# Altium PCB Main.PcbDoc
Units mil, origin at the board's own origin, x right, y up, seen from the top; angles counter-clockwise.
Board outline 2475 x 1740 mil, 2 copper layers (Top Layer, Bottom Layer); 63 components, 40 nets, 195 pads, 60 vias.
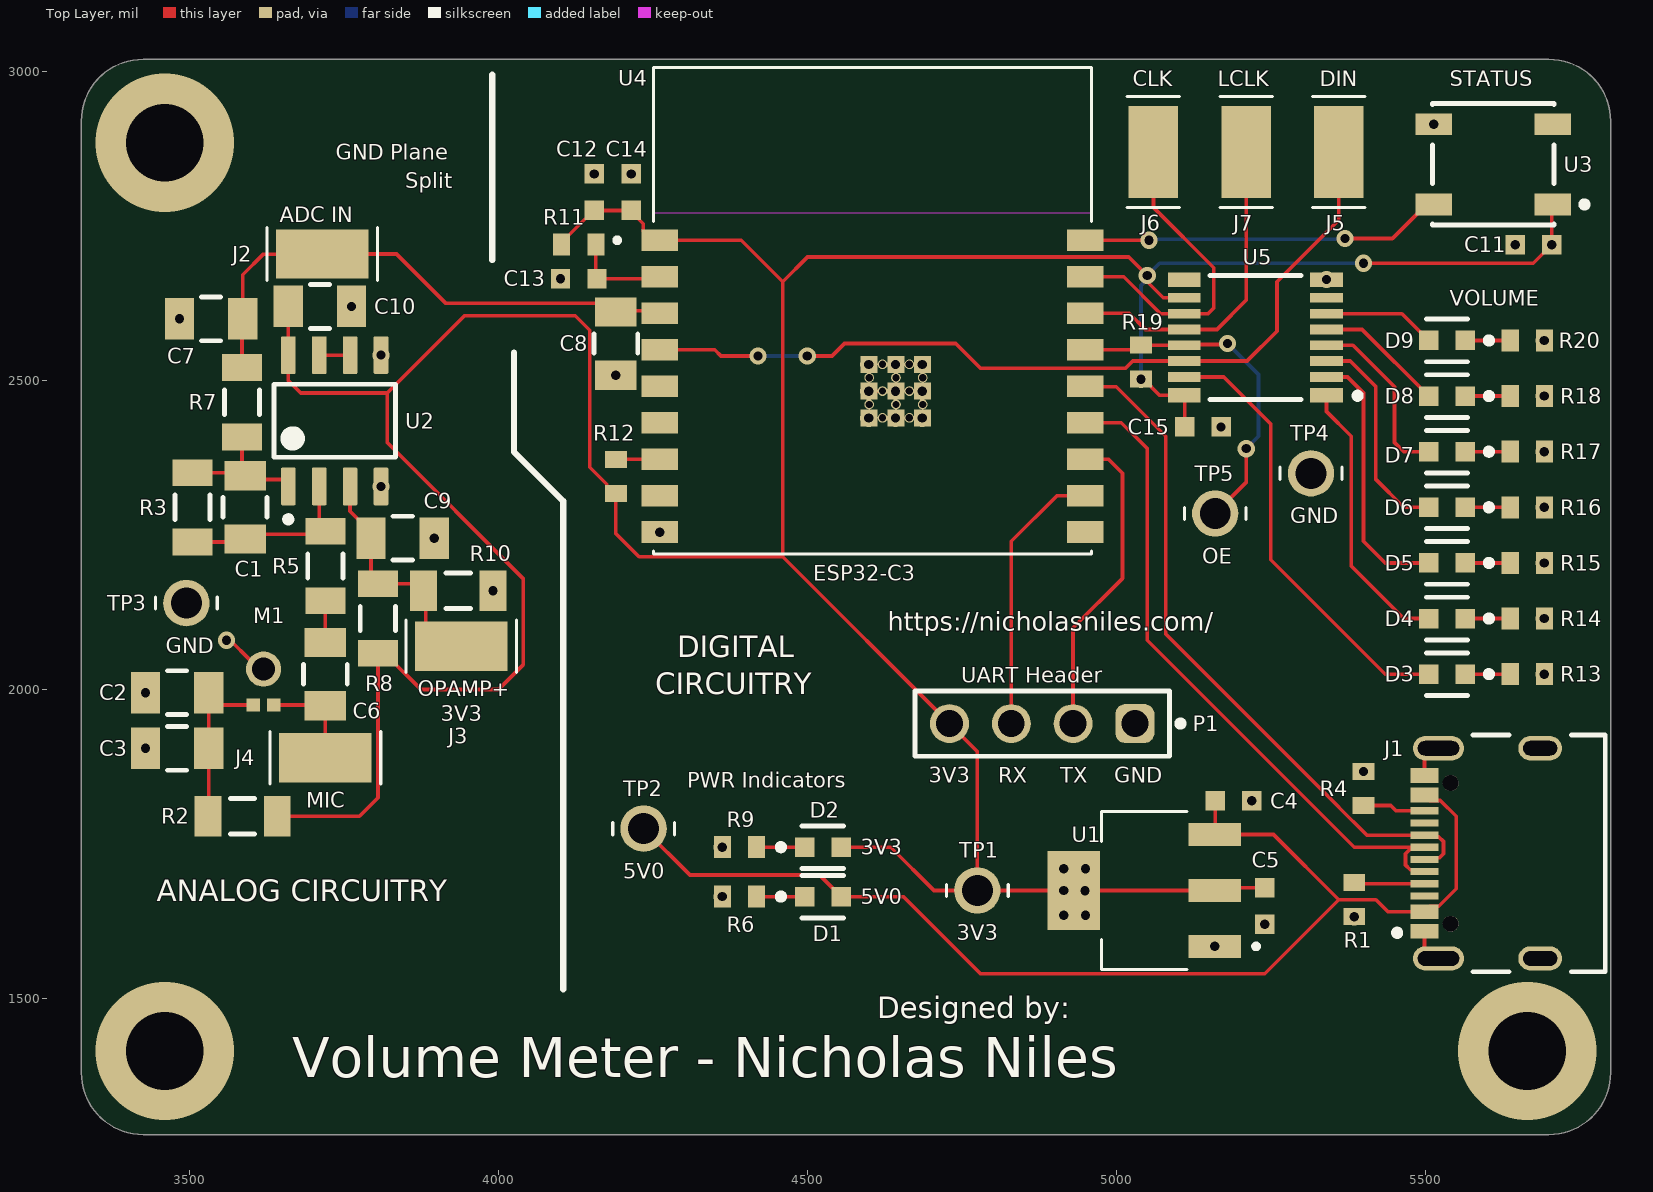
[diagram p0: Top Layer view]
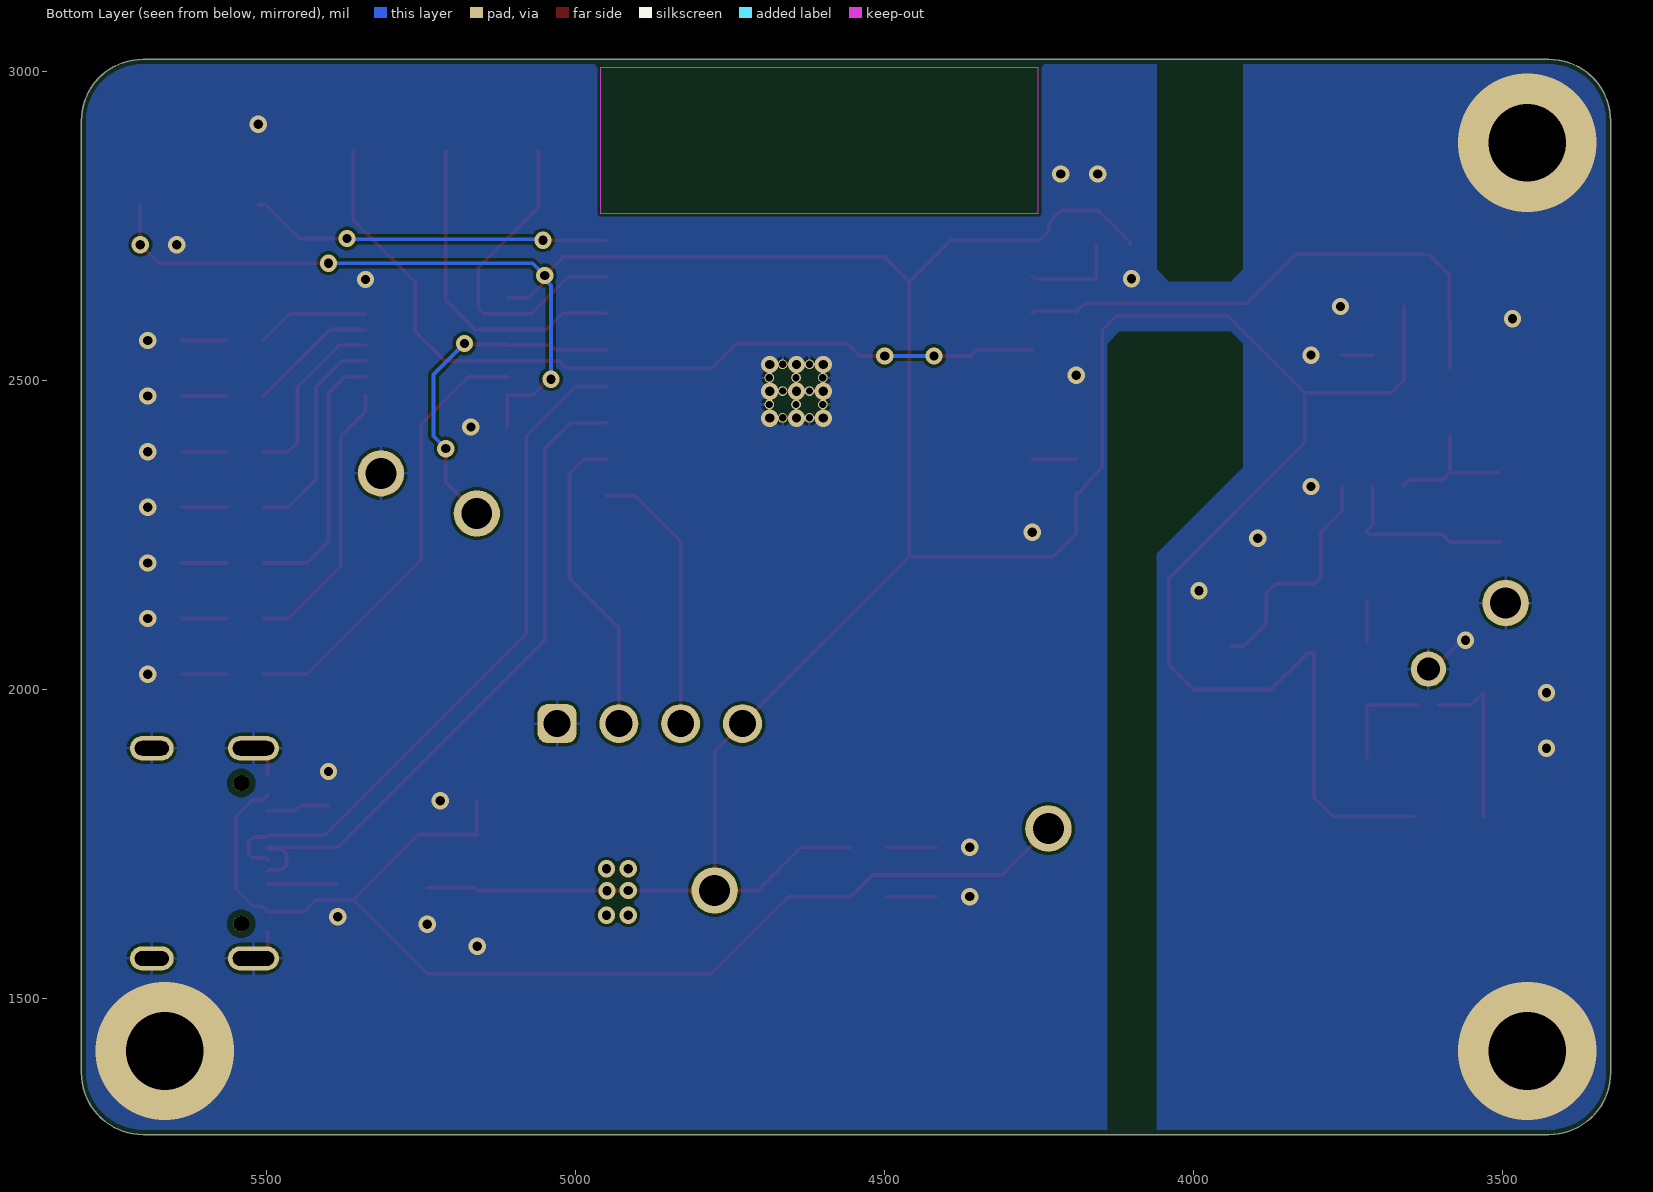
[diagram p1: Bottom Layer view, seen from below]
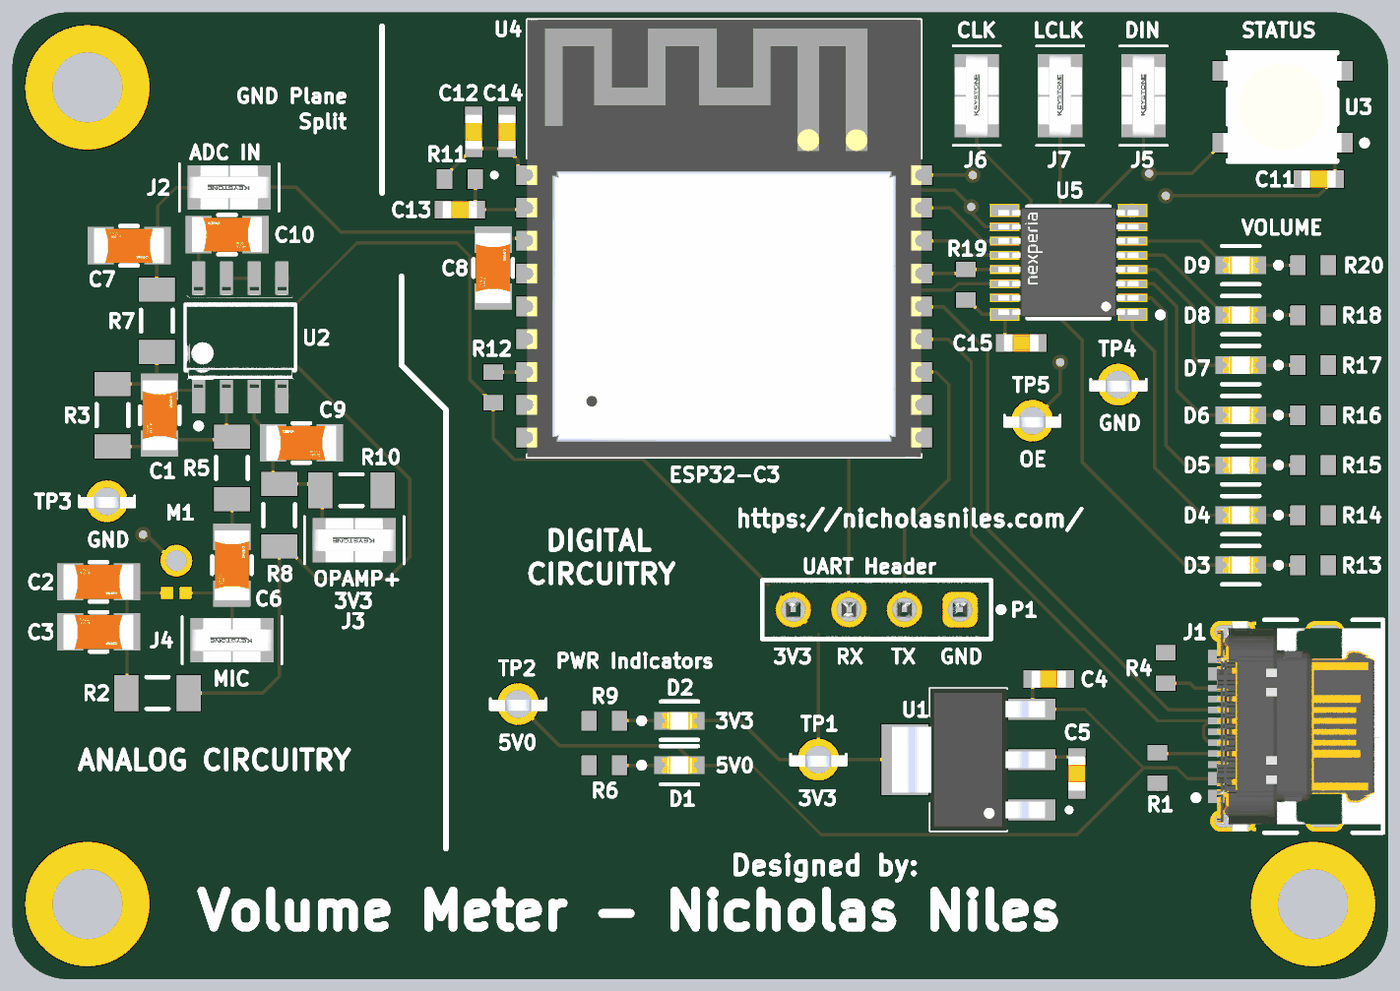
[diagram p2: 3D render of the assembled board from above, using the file's embedded part models]

## Layer stack, top to bottom
Top Solder: solder mask 0.4, Solder Resist, Dk 3.5
Top Layer: signal copper 1.4
Dielectric 1: dielectric 12.6, FR-4, Dk 4.8
Bottom Layer: signal copper 1.4
Bottom Solder: solder mask 0.4, Solder Resist, Dk 3.5

## Board outline
3325,1380 3325,2920 cw(c3425,2920) 3425,3020 5700,3020 cw(c5700,2920) 5800,2920 5800,1380 cw(c5700,1380) 5700,1280 3425,1280 cw(c3425,1380)

## Design rules (kind name [scope] priority, off if disabled: settings)
BoardOutlineClearance [All] p1: gap=7.87 ignorepadtopadclearanceinfootprint=FALSE
Clearance [All] p1: gap=5 ignorepadtopadclearanceinfootprint=TRUE except(10: Arc-Hole Track-Hole SMDPad-Hole THPad-Hole Via-Hole Fill-Hole Poly-Hole Region-Hole Text-Hole)
ComponentClearance [All] p1: gap=5 collisioncheckmode=3 verticalgap=5 showdistances=TRUE
DiffPairsRouting [All] p1: maxlimit=10 minlimit=5 mostfreqgap=5 toplayer_minwidth=5 toplayer_maxwidth=1000 toplayer_prefwidth=5 bottomlayer_minwidth=5 bottomlayer_maxwidth=1000 bottomlayer_prefwidth=5 maxuncoupledlength=500
Height [All] p1: minheight=0 maxheight=71497.94 prefheight=500
HoleSize [All] p1: absolutevalues=TRUE maxlimit=248.03 minlimit=11.81 maxpercent=80.000 minpercent=20.000
HoleToHoleClearance [All] p1: gap=10 allowstackedmicrovias=FALSE
MinimumAnnularRing [All] p1: minimumring=6
MinimumSolderMaskSliver [All] p1: minsoldermaskwidth=6
PlaneClearance [All] p1: clearance=5
PlaneConnect PlaneConnectPowerPads [InPadClass('PowerPads')] p1: planeconnectstyle=Direct reliefexpansion=20 reliefentries=4 reliefconductorwidth=10 reliefairgap=10
PlaneConnect [All] p2: pad.planeconnectstyle=Relief pad.reliefexpansion=11.81 pad.reliefentries=4 pad.reliefconductorwidth=5 pad.reliefairgap=5 via.planeconnectstyle=Direct via.reliefexpansion=11.81 via.reliefentries=4 via.reliefconductorwidth=5 via.reliefairgap=5
PolygonConnect PolygonConnectPowerPads [All vs (InPadClass('PowerPads'))] p1: connectstyle=Direct reliefconductorwidth=10 reliefentries=4 polygonreliefangle="90 Angle" airgapwidth=10
PolygonConnect [All] p2: thpad.connectstyle=Relief thpad.reliefconductorwidth=5 thpad.reliefentries=4 thpad.polygonreliefangle="90 Angle" thpad.airgapwidth=5 smdpad.connectstyle=Relief smdpad.reliefconductorwidth=5 smdpad.reliefentries=4 smdpad.polygonreliefangle="90 Angle" smdpad.airgapwidth=5 via.connectstyle=Direct via.reliefconductorwidth=5 via.reliefentries=4 via.polygonreliefangle="90 Angle" via.airgapwidth=5
RoutingVias [All] p1: holewidth=11.81 width=23.62 viastyle="Through Hole" minholewidth=11.81 minwidth=23.62 maxholewidth=23.62 maxwidth=259.84
SilkToSilkClearance [All] p1: silktosilkclearance=5
SilkToSolderMaskClearance [IsPad] p1: minsilkscreentomaskgap=5 clearancetoexposedcopper=TRUE
SolderMaskExpansion [All] p1: expansion=2 istentingtop=FALSE
SupplyNets "Schematic Supply Nets_2" [InNet('GND')] p1: voltage=0.000
SupplyNets "Schematic Supply Nets_1" [InNet('3V3')] p2: voltage=0.000
SupplyNets "Schematic Supply Nets" [InNet('5V0')] p3: voltage=0.000
UnRoutedNet [All] p1: checkbadconnections=TRUE
Width Width_10mil [All] p1: maxlimit=6 minlimit=6 preferedwidth=6 minimp=50.000000 maximp=50.000000 favimp=50.000000
Width Width_6mil [All] p2: maxlimit=1000 minlimit=6 preferedwidth=6 minimp=50.000000 maximp=50.000000 favimp=50.000000
Width Power_20mil [All] p3: maxlimit=1000 minlimit=20 preferedwidth=20 minimp=50.000000 maximp=50.000000 favimp=50.000000
Width Power_12mil [All] p4: maxlimit=1000 minlimit=12 preferedwidth=12 minimp=50.000000 maximp=50.000000 favimp=50.000000
Width Width_5mil [All] p5: maxlimit=1000 minlimit=5 preferedwidth=5 minimp=50.000000 maximp=50.000000 favimp=50.000000
19 further rules are at their usual default settings.

## Components (designator, comment, footprint, x,y, rotation, side; value= is the part's Value field where it differs from the comment)
C1 "330pF" FP-AC1206-0_85-IPC_C 3590,2295 r90 top value="22 nF"
C2 "0.1uF" FP-AC1206-0_85-IPC_C 3480,1995 r0 top value="22 nF"
C3 "10uF" FP-AC1206-0_85-IPC_C 3480,1905 r0 top value="22 nF"
C4 "1µF" WCAP-CSGP_0603_L1.6W0.8H0.8_Reflow 5189.53,1820 r180 top
C5 "10uF" WCAP-CSGP_0603_L1.6W0.8H0.8_Reflow 5240,1650 r90 top
C6 "4.7uF" FP-AC1206-0_85-IPC_C 3720,2025 r90 top value="22 nF"
C7 "1nF" FP-AC1206-0_85-IPC_C 3535,2600 r0 top value="22 nF"
C8 "1nF" FP-AC1206-0_85-IPC_C 4190,2560 r90 top value="22 nF"
C9 "10uF" FP-AC1206-0_85-IPC_C 3845,2245 r180 top value="22 nF"
C10 "100nF" FP-AC1206-0_85-IPC_C 3711.2,2620 r180 top value="22 nF"
C11 "0.1µF" WCAP-CSGP_0603_L1.6W0.8H0.8_Reflow 5675,2720 r0 top
C12 "0.1µF" WCAP-CSGP_0603_L1.6W0.8H0.8_Reflow 4155,2805 r90 top
C13 "1µF" WCAP-CSGP_0603_L1.6W0.8H0.8_Reflow 4130,2665 r0 top
C14 "10µF" WCAP-CSGP_0603_L1.6W0.8H0.8_Reflow 4215,2805 r270 top
C15 "100nF" WCAP-CSGP_0603_L1.6W0.8H0.8_Reflow 5140,2425 r180 top
D1 "LTST-C190KGKT" FP-LTST-C190KGKT-MFG 4525,1665 r0 top
D2 "LTST-C190KGKT" FP-LTST-C190KGKT-MFG 4525,1745 r0 top
D3 "LTST-C190KGKT" FP-LTST-C190KGKT-MFG 5535,2025 r180 top
D4 "LTST-C190KGKT" FP-LTST-C190KGKT-MFG 5535,2115 r180 top
D5 "LTST-C190KGKT" FP-LTST-C190KGKT-MFG 5535,2205 r180 top
D6 "LTST-C190KGKT" FP-LTST-C190KGKT-MFG 5535,2295 r180 top
D7 "LTST-C190KGKT" FP-LTST-C190KGKT-MFG 5535,2385 r180 top
D8 "LTST-C190KGKT" FP-LTST-C190KGKT-MFG 5535,2475 r180 top
D9 "LTST-C190KGKT" FP-LTST-C190KGKT-MFG 5535,2565 r180 top
J1 "USB4105-GF-A" FP-USB4105-GF-A-MFG 5640,1735 r90 top
J2 "5019" 5019_MFG 3715,2705 r180 top
J3 "5019" 5019_MFG 3940,2070 r180 top
J4 "5019" 5019_MFG 3720,1890 r180 top
J5 "5019" 5019_MFG 5360,2870 r90 top
J6 "5019" 5019_MFG 5060,2870 r90 top
J7 "5019" 5019_MFG 5210,2870 r90 top
M1 "SPV0142LR5H-1" SPV0142LR5H-1 3620,1975 r180 top
P1 "61300411121" 61300411121 4880,1945 r180 top
R1 "5.1kΩ" RESC1608X55X25NL10T15 5385,1660 r90 top
R2 "100" RESC3216X70X50NL05T20 3586.1,1795 r0 top
R3 "51k" RESC3216X70X50NL05T20 3505,2295 r90 top
R4 "5.1kΩ" RESC1608X55X25NL10T15 5400,1840 r270 top
R5 "2.4k" RESC3216X70X50NL05T20 3720,2200 r90 top
R6 "2.2kΩ" RESC1608X55X25NL10T15 4390,1665 r0 top
R7 "100" RESC3216X70X50NL05T20 3585,2465 r90 top
R8 "10k" RESC3216X70X50NL05T20 3805,2115 r90 top
R9 "1kΩ" RESC1608X55X25NL10T15 4390,1745 r0 top
R10 "10k" RESC3216X70X50NL05T20 3935,2160 r180 top
R11 "10kΩ" RESC1608X55X25NL10T15 4130,2720 r180 top
R12 "10kΩ" RESC1608X55X25NL10T15 4190,2345 r90 top
R13 "470" RESC1608X55X25NL10T15 5665,2025 r180 top
R14 "470" RESC1608X55X25NL10T15 5665,2115 r180 top
R15 "470" RESC1608X55X25NL10T15 5665,2205 r180 top
R16 "470" RESC1608X55X25NL10T15 5665,2295 r180 top
R17 "470" RESC1608X55X25NL10T15 5665,2385 r180 top
R18 "470" RESC1608X55X25NL10T15 5665,2475 r180 top
R19 "10kΩ" RESC1608X55X25NL10T15 5040,2530 r90 top
R20 "470" RESC1608X55X25NL10T15 5665,2565 r180 top
TP1 "1035" KEYSTONE_1035 4775,1675 r0 top
TP2 "1035" KEYSTONE_1035 4235,1775 r0 top
TP3 "1035" KEYSTONE_1035 3495,2140 r0 top
TP4 "1035" KEYSTONE_1035 5315,2350 r0 top
TP5 "1035" KEYSTONE_1035 5160,2285 r0 top
U1 "TLV1117LV33DCYR" VREG_TLV1117LV33DCYR 5045,1675 r180 top
U2 "TLV9062IDR" FP-D0008A-MFG 3735,2435 r90 top
U3 "1655" ADA-RGB-1655_V 5610,2850 r180 top
U4 "ESP32-C3-WROOM-02-N4" MODULE_ESP32-C3-WROOM-02-H4 4605.51,2612.99 r0 top
U5 "74HC595PW,118" FP-SOT403-1-MFG 5225,2570 r180 top

## Footprints (in the part's own frame and the unit in brackets; to place one, negate y for a bottom-side part, rotate by r counter-clockwise, add the part's x,y. Pads: shape width x height; smd on the part's side, far side on the other; paste and mask are expansions set on the pad)
5019_MFG [mm] "Recommended Land Pattern"
  rect 3.8x2.03 smd paste+0 mask+0: 1(0,0)
  silkscreen extent -2.27,-1.08 2.27,1.08, body extent -1.91,-1.01 1.91,1.01, height 2.42
61300411121 [mm] "Pin Header, pitch 2.54 mm, THT, Vertical, single row, 4p"
  rrect50% 1.6x1.6 hole 1.1: 1(-3.81,0)
  round 1.6 hole 1.1: 2(-1.27,0) 3(1.27,0) 4(3.81,0)
  silkscreen extent -5.8,-1.35 5.23,1.35, body extent -5.08,-1.27 5.08,1.27, height 8.57
ADA-RGB-1655_V [mm] "SMD, 4-Leads, Body 5x5mm"
  rect 1.5x0.9 smd: 1(-2.45,1.65) 2(-2.45,-1.65) 3(2.45,-1.65) 4(2.45,1.65)
  silkscreen extent -3.88,-2.5 2.5,2.5, body extent -2.7,-2.5 2.7,2.5, height 1.68
FP-AC1206-0_85-IPC_C [mil]
  rect 47.38x67.17 smd paste+0 mask+0: 1(-51.2,0) 2(51.2,0)
  silkscreen extent -16,-35 16,35, body extent -79,-39 79,39, height 10
FP-D0008A-MFG [mm]
  rrect17% 1.55x0.6 smd paste+0 mask+0: 1(-2.7,1.905) 2(-2.7,0.635) 3(-2.7,-0.635) 4(-2.7,-1.905) 5(2.7,-1.905) 6(2.7,-0.635) 7(2.7,0.635) 8(2.7,1.905)
  silkscreen extent -4.17,-2.5 1.5,2.5, body extent -3.57,-2.75 3.57,2.75, height 0.25
FP-LTST-C190KGKT-MFG [mm]
  rect 0.8x0.8 smd paste+0 mask+0: 1(-0.75,0) 2(0.75,0)
  silkscreen extent -1.85,-0.87 0.85,0.87, body extent -1.25,-0.55 1.25,0.55, height 0.25
FP-SOT403-1-MFG [mm]
  rect 1.35x0.6 smd paste-1000 mask+0: 1(-2.925,2.375) 8(-2.925,-2.375) 9(2.925,-2.375) 16(2.925,2.375)
  rect 1.35x0.4 smd paste-1000 mask+0: 2(-2.925,1.625) 3(-2.925,0.975) 4(-2.925,0.325) 5(-2.925,-0.325) 6(-2.925,-0.975) 7(-2.925,-1.625) 10(2.925,-1.625) 11(2.925,-0.975) 12(2.925,-0.325) 13(2.925,0.325) 14(2.925,0.975) 15(2.925,1.625)
  silkscreen extent -4.33,-2.55 1.88,2.55, body extent -3.72,-2.9 3.72,2.9, height 0.25
FP-USB4105-GF-A-MFG [mm]
  rrect100% 1x2.1 hole 1.7 slot 0.6 at 0 deg paste-2539.97 mask+0: 1(-4.32,3.015) 2(4.32,3.015)
  rrect100% 1x1.8 hole 1.4 slot 0.6 at 0 deg paste-2539.97 mask+0: 3(-4.32,-1.165) 4(4.32,-1.165)
  rect 0.6x1.15 smd paste+0 mask+0: A1-B12(-3.2,3.59) A4-B9(-2.4,3.59) B1-A12(3.2,3.59) B4-A9(2.4,3.59)
  rect 0.3x1.15 smd paste+0 mask+0: A5(-1.25,3.59) A6(-0.25,3.59) A7(0.25,3.59) A8(1.25,3.59) B5(1.75,3.59) B6(0.75,3.59) B7(-0.75,3.59) B8(-1.75,3.59)
  round 0.65 hole 0.65 unplated paste-2539.97 mask+0: ""(-2.89,2.515) ""(2.89,2.515)
  silkscreen extent -4.86,-3.84 4.86,4.84, body extent -4.96,-3.94 4.96,4.27, height 0.25
KEYSTONE_1035 [mil]
  round 75 hole 50: TP(0,0)
  silkscreen extent -50,-10 50,10, body extent -50,-12 50,8, height 220
MODULE_ESP32-C3-WROOM-02-H4 [mm]
  rect 1.5x0.9 smd: 1(-8.75,2.9) 2(-8.75,1.4) 3(-8.75,-0.1) 4(-8.75,-1.6) 5(-8.75,-3.1) 6(-8.75,-4.6) 7(-8.75,-6.1) 8(-8.75,-7.6) 9(-8.75,-9.1) 10(8.75,-9.1) 11(8.75,-7.6) 12(8.75,-6.1) 13(8.75,-4.6) 14(8.75,-3.1) 15(8.75,-1.6) 16(8.75,-0.1) 17(8.75,1.4) 18(8.75,2.9)
  rect 0.7x0.7 smd: 19(-0.14,-2.2) 20(0.96,-2.2) 21(2.06,-2.2) 22(-0.14,-3.3) 23(0.96,-3.3) 24(2.06,-3.3) 25(-0.14,-4.4) 26(0.96,-4.4) 27(2.06,-4.4)
  round 0.4 hole 0.3 mask+0: 28(0.41,-2.2) 29(1.51,-2.2) 30(-0.14,-2.75) 31(0.96,-2.75) 32(2.06,-2.75) 33(0.41,-3.3) 34(1.51,-3.3) 35(-0.14,-3.85) 36(0.96,-3.85) 37(2.06,-3.85) 38(0.41,-4.4) 39(1.51,-4.4)
  Keep-Out Layer region: 9,4 -9,4 -9,10 9,10
  Keep-Out Layer region: 9,4 -9,4 -9,10 9,10
  silkscreen extent -10.6,-10 9,10, body extent -9,-10 9,10, height 3.35
RESC1608X55X25NL10T15 [mm] "Chip Resistor, 2-Leads, Body 1.60x0.80mm, IPC Medium Density"
  rect 0.7x0.9 smd: 1(-0.7,0) 2(0.7,0)
  body extent -0.85,-0.45 0.85,0.45, height 0.55
RESC3216X70X50NL05T20 [mm] "Chip Resistor, 2-Leads, Body 3.20x1.60mm, IPC Medium Density"
  rect 1.1x1.65 smd: 1(-1.425,0) 2(1.425,0)
  silkscreen extent -0.5,-0.72 0.5,0.72, body extent -1.63,-0.82 1.62,0.82, height 0.7
SPV0142LR5H-1 [mm]
  rect 0.545x0.545 / inner round 0 / far side round 0 all layers, no hole: 1(0.423,0) 2(-0.423,0)
  round 1.45 hole 0.95: 3(0,-1.478)
VREG_TLV1117LV33DCYR [mm]
  rect 2.15x0.95 smd: 1(-2.9,2.3) 2(-2.9,0) 3(-2.9,-2.3)
  rect 2.15x3.25 smd: 4(2.9,0)
  silkscreen extent -4.7,-3.25 1.75,3.25, body extent -3.5,-3.25 3.5,3.25, height 1.8
WCAP-CSGP_0603_L1.6W0.8H0.8_Reflow [mm] "Ceramic Capacitors, body 1.6x0.8mm"
  rect 0.8x0.8 smd: 1(-0.75,0) 2(0.75,0)
  body extent -0.8,-0.4 0.8,0.4, height 0.8

## Part data
C1 C2 C3 C6 C7 C8 C9 C10: library part CMP-03422-000551-1, "AC1206 22 nF X7R 10.00% 100 V", Capacitance="22 nF", Manufacturer=Yageo, Manufacturer Part Number=AC1206KRX7R0BB223, Package=AC1206-0.85, Temperature="-55°C to +125°C", Temperature Characteristic=X7R, Temperature Coefficient=15%, Temperature Range High=+125°C, Temperature Range Low=-55°C, Tolerance=0.1, Voltage Rating="100 V", Automotive=Yes, Automotive Grade="Grade 1", Category=Cap, ComponentLink2Description=Datasheet, ComponentLink2URL=http://www.yageo.com/documents/recent/UPY-AC_NP0X7R_16V-to-630V_12.pdf, Device Class L1="Passive Components", Device Class L2=Capacitors, Device Class L3="Ceramic Capacitors", Footprint Url=http://www.yageo.com/exep/pages/download/literatures/UPY-C_GEN_24.pdf, Height=0.95mm, Ipc Land Pattern Name=CAPC320160X85, Lead Free=Yes, Material=Ceramic, Octopart=https://octopart.com/ac1206krx7r0bb223-yageo-78873672, RoHS=TRUE
C4 C5 C11 C12 C13 C14 C15: library part CMP-207839-000060-3, "10V tolerance"
D1 D2 D3 D4 D5 D6 D7 D8 D9: library part CMP-2000-05197-2, "LED GREEN CLEAR CHIP SMD", Case Code (Imperial)=0603, Case Code (Metric)=1608, Color=Green, Forward Current=30mA, Forward Voltage=2V, Lens Color=Colorless, Max Operating Temperature=85°C, Min Operating Temperature=-55°C, Package Quantity=1, Power Dissipation=75mW, Reverse Voltage=5V, Test Current=20mA, Case/Package=0603, Depth=0.8mm, Dominant Wavelength=571nm, Height=0.8mm, Illumination Color=Green, Lead Free="Lead Free", Length=1.6mm, Lens Style=Diffused, Lens Transparency=Clear, Luminous Intensity=35mcd, Mount="Surface Mount", Number of Elements=1, Number of LEDs=1, Number of Pins=2, Packaging="Tape and Reel", Power Rating=75mW, Radiation Hardening=No, Viewing Angle=130°, Wavelength=574nm, Width=0.8mm
J1: library part CMP-245163-000001-1, "CONN RCPT USB2.0 TYPEC 5A", Current Rating=5/6.25/1.25/0.25A, Manufacturer=GCT, Package=0, Temperature="-40°C to +85°C", Temperature Range High=+85°C, Temperature Range Low=-40°C, Voltage Rating=20V, Automotive=No, Category=Conn, ComponentLink2Description=Datasheet, ComponentLink2URL=https://gct.co/files/drawings/usb4105.pdf, Conn Orientation="Right Angle", Contact Material=Gold,Nickel, Device Class L1=Connectors, Device Class L2="USB Connectors", Device Class L3=unset, Digikey Description="CONN RCPT USB2.0 TYPEC 5A", Height=3.46mm, Is Female=yes, Lead Free=Yes, Manufacturer Part Number=USB4105-GF-A, Number of Contacts=16, Octopart=https://octopart.com/usb4105-gf-a-gct-106627878, RoHS=TRUE, Usb Standard="USB 2.0"
J2 J3 J4 J5 J6 J7: library part CMP-1672-00008-3, "Phosphor Bronze Contact Miniature Silver Plated Surface Mount Test Points", China RoHS=Compliant, ComponentLink1Description="Manufacturer's Website", ComponentLink1URL=http://www.keyelco.com/, ComponentLink2Description="Datasheet URL", ComponentLink2URL=https://www.keyelco.com/product-pdf.cfm?p=1357, Contact Material=Silver, Contact Plating=Silver, Height=2.42mm, HelpURL=https://www.keyelco.com/product-pdf.cfm?p=1357, Lead Free="Lead Free", Lifecycle Status=Production, Material=Bronze, Mount="Surface Mount", Number of Contacts=1, Number of Pins=1, Packaging="Tape and Reel", REACH SVHC=Yes, RoHS=Compliant, Termination=SMD/SMT
P1: library part CMP-1502-01064-4, "THT Vertical Pin Header WR-PHD, Pitch 2.54 mm, Single Row, 4 pins", Color=Black, Contact Resistance=20mΩ, Current Rating=3A, Max Operating Temperature=105°C, Min Operating Temperature=-40°C, Operating Supply Voltage=250V, Connector Type="Male Pin", Contact Material=Gold, Contact Mating Length=5.9944mm, Contact Plating=Gold, Gender=Male, Height=8.89mm, Lead Free="Lead Free", Lead Pitch=2.54mm, Mount="Through Hole", Number of Contacts=4, Number of Pins=4, Number of Positions=4, Number of Rows=1, Orientation=Vertical, Packaging=Bulk, Pitch=2.54mm, RoHS=Compliant, Termination=Solder, Voltage Rating=250V
R1 R4 R6 R9 R11 R12 R13 R14 R15 R16 R17 R18 R19 R20: library part CMP-2000-04186-1
R2 R3 R5 R7 R8 R10: library part CMP-2003-00307-1, Manufacturer=Panasonic, Part Number=ERJ8ENF3300V
TP1 TP2 TP3 TP4 TP5: "Test Point PC Slotted THM Height .335 Brass/Tin", Package=None, Check_prices=https://www.snapeda.com/parts/1035/Keystone/view-part/?ref=eda, MF="Keystone Electronics", MP=1035, SnapEDA_Link=https://www.snapeda.com/parts/1035/Keystone/view-part/?ref=snap
U1: "1-A, low-dropout voltage regulator", Package="SOT-223-4 Texas Instruments", Check_prices=https://www.snapeda.com/parts/TLV1117LV33DCYR/Texas+Instruments/view-part/?ref=eda, Digi-Key_Part_Number=296-28778-2-ND, MF="Texas Instruments", MP=TLV1117LV33DCYR, Purchase-URL=https://pricing.snapeda.com/search/part/TLV1117LV33DCYR/?ref=eda, SnapEDA_Link=https://www.snapeda.com/parts/TLV1117LV33DCYR/Texas+Instruments/view-part/?ref=snap
U2: library part CMP-04895-000302-1, "IC CMOS 2 CIRCUIT 8SOIC", Case/Package=SOIC, Input Bias Current=0.5pA, Input Offset Voltage (Vos)=300uV, Max Operating Temperature=125°C, Min Operating Temperature=-40°C, Operating Supply Current=538uA, Output Current per Channel=50mA, Gain Bandwidth Product=10MHz, Mount="Surface Mount", Number of Channels=2, Number of Circuits=2, Number of Pins=8, Packaging="Tape and Reel", RoHS Compliant=Yes, Slew Rate=6.5V/µs
U3: library part CMP-2000-05026-1, "Intelligent Control LED Integrated Light Source, 3.5 to 5.3 V, -25 to 80 degC, 4-Pin SMD, RoHS, Tape and Reel", Color=Red,Green,Blue(RGB), Manufacturer=Adafruit-Industries-LLC, Package Description="4-Pin Surface Mount Device, Body 5 x 5 mm", Category=Optoelectronics, Configuration=Discrete, Controller Type=-, Datasheet URL=http://datasheet.octopart.com/ADA1655-Adafruit-Industries-datasheet-32028139.pdf, Datasheet Version=May-13, Family=Addressable,Specialty, Interface=-, Manufacturer URL=https://www.adafruit.com/, Mounting Type=SurfaceMount, Number of LEDs=10, Package Reference=1655, Series=Neopixel, Size / Dimension=5.00mmLx5.00mmW, Utilized LED=WS2812(5050)
U4: "WiFi Modules (802.11) (Engineering Samples) SMD module, ESP32-C3, 4MB SPI flash, PCB antenna, -40 C +85 C", Package=Package, Availability="In Stock", Check_prices=https://www.snapeda.com/parts/ESP32-C3-WROOM-02-N4/Espressif+Systems/view-part/?ref=eda, MF="Espressif Systems", MP=ESP32-C3-WROOM-02-N4, Price=None, Purchase-URL=https://pricing.snapeda.com/search/part/ESP32-C3-WROOM-02-N4/?ref=eda, SnapEDA_Link=https://www.snapeda.com/parts/ESP32-C3-WROOM-02-N4/Espressif+Systems/view-part/?ref=snap
U5: library part CMP-14351-000004-1, "IC SHIFT REGISTER 8BIT 16TSSOP"

## Via types
v1: diameter 28, hole 15, Top Layer to Bottom Layer, tented both sides, 51 vias
v2: diameter 28, hole 15, Top Layer to Bottom Layer, 6 vias
v3: diameter 223.62/223.62 (per signal layer), hole 125.98, Top Layer to Bottom Layer, 3 vias

## Nets (pads, with @x,y where several pads share a name; then routed paths per layer and width w, separated by ;. In a path a pad name is that pad's centre, name@x,y a point inside that pad or via, vN(x,y) a via of type N, cw(c..) or ccw(c..) an arc to the next point about the centre after c; other vN are vias at no path point)
3V3: C5.2 C10.2 C11.2 C12.1 C14.2 C15.2 D2.2 P1.4 R2.2 R8.1 R11.2 R12.1 R19.1 TP1.TP U1.2 U1.4 U2.8 U3.1 U4.1 U5.10 U5.16 | length 6539.6
  Top Layer w6: R2.2 3775,1795 3805,1825 R8.1 3815.83,2058.9 3874.72,2000 4000,2000 4040,2040 4040,2180 3820,2400 3820,2480 ; C10.2 U2.8 3660,2500 3680,2480 3820,2480 ; R11.2 4102.44,2723.94 4141.23,2762.72 4142.25,2762.72 C12.1 C14.2 4227.75,2762.72 4227.75,2760.44 4234.5,2753.69 4234.5,2741.88 4249.21,2727.17 U4.1 4392.83,2727.17 4460,2660 ; D2.2 4635,1745 4705,1675 TP1.TP ; R19.1@5043.94,2502.44 5069.88,2476.5 U5.16 5110.47,2475.87 C15.2 ; U5.10 5076.02,2633.98 5050,2660 v1(5050,2670) 5020,2700 4500,2700 4460,2660 ; C5.2 5163.7,1679.53 U1.2 v2(4915,1675) TP1.TP ; v1(5400,2690) 5674.53,2690 v1(5704.53,2720) 5704.53,2783.11 U3.1 ; 3820,2480 3945,2605 4124.38,2605 4147.79,2581.59 4147.79,2359.65 4175.28,2332.16 4175.28,2328.22 4186.06,2317.44 R12.1 4190,2252.69 4227.69,2215 4460,2215 ; 4460,2215 4460,2660 ; 4460,2215 P1.4 4775,1900 TP1.TP
  Bottom Layer w6: v1(5040,2502.44) 5040,2654.05 5050,2664.05 v1(5050,2670) 5070,2690 v1(5400,2690)
  other v2: 4915,1635 4950,1635 4949.17,1674.59 4915,1710 4950,1710
5V0: C4.2 D1.2 J1.A4-B9 J1.B4-A9 TP2.TP U1.3 | length 1967.8
  Top Layer w6: TP2.TP 4310,1700 4519.53,1700 D1.2 4655,1665 4780,1540 5240,1540 5360,1660 ; C4.2 5160,1766.38 U1.3 5254.45,1765.55 5360,1660 ; J1.B4-A9 5507.47,1820.68 5524.21,1820.68 5550,1794.89 5550,1677.58 5521.74,1649.32 5507.47,1649.32 J1.A4-B9 5439.49,1640.51 5420,1660 5360,1660
CLK: J6.1 U4.17 U5.11 | length 528.9
  Top Layer w6: U4.17 5011.89,2668.11 5071.61,2608.39 U5.11 5148.39,2608.39 5157.51,2617.51 5157.51,2682.49 5060,2780 J6.1
D+: J1.A6 J1.B6 U4.14 | length 1126.3
  Top Layer w6: U4.14 4950.94,2490 5000,2490 5080,2410 5080,2090 5360,1810 5360,1809.63 5405.1,1764.53 J1.B6 5501.57,1761.62 5521.74,1761.62 5529.3,1754.06 5529.3,1734.45 5522.91,1728.06 5501.57,1728.06 J1.A6
D-: J1.A7 J1.B7 U4.13 | length 1103.2
  Top Layer w6: U4.13 5008.11,2431.89 5050,2390 5050,2080 5385.16,1744.84 J1.A7 5495.76,1741.94 5475.58,1741.94 5468.02,1734.38 5468.02,1715.94 5475.58,1708.38 5495.76,1708.38 J1.B7
DIN: J5.1 U4.4 U5.14 | length 1384.2
  Top Layer w6: U4.4 4350,2550 4360,2540 v1(4420,2540) ; v1(4500,2540) 4540,2540 4560,2560 4740,2560 4780,2520 5014.75,2520 5026.36,2531.61 U5.14 5211.61,2531.61 5260,2580 5260,2660 5360,2760 J5.1
  Bottom Layer w6: v1(4420,2540) v1(4500,2540)
EN: C13.2 R11.1 U4.2 | length 158.6
  Top Layer w6: R11.1 4157.56,2666.97 C13.2 4257.91,2665 U4.2
GND: C2.1 C3.1 C4.1 C5.1 C7.1 C8.1 C9.1 C10.1 C11.1 C12.2 C13.1 C14.1 C15.1 J1.1 J1.2 J1.3 J1.4 J1.A1-B12 J1.B1-A12 M1.3 P1.1 R1.1 R4.1 R6.1 R9.1 R10.1 R13.1 R14.1 R15.1 R16.1 R17.1 R18.1 R20.1 TP3.TP TP4.TP U1.1 U2.4 U2.5 U3.3 U4.9 U4.19 U4.20 U4.21 U4.22 U4.23 U4.24 U4.25 U4.26 U4.27 U4.28 U4.29 U4.30 U4.31 U4.32 U4.33 U4.34 U4.35 U4.36 U4.37 U4.38 U4.39 U5.8 | length 219
  Top Layer w6: TP3.TP TP3.TP@3504.08,2140 ; v1(3560,2080) 3565.95,2080 M1.3@3597.98,2047.98 ; v1(4599.17,2482.66) v1(4642.48,2482.66) ; J1.A1-B12 5498.66,1580.34 5514.08,1564.92 J1.1 ; J1.B1-A12 5498.66,1889.66 5514.08,1905.08 J1.2
  other v1: 5159.17,1584.45 5240,1620.47 5385,1632.44 4362.44,1665 4362.44,1745 5219.06,1820 5400,1867.56 3428.8,1905 3428.8,1995 5692.56,2025 5692.56,2115 3991.1,2160 5692.56,2205 3896.2,2245 4261.02,2254.72 5692.56,2295 3810,2328.7 5692.56,2385 5169.53,2425 4599.17,2439.36 4642.48,2439.36 4685.79,2439.36 5692.56,2475 4685.79,2482.66 4190,2508.8 4599.17,2525.97 4642.48,2525.97 4685.79,2525.97 3810,2541.3 5692.56,2565 3483.8,2600 3762.39,2620 5340.16,2663.5 4100.47,2665 5645.47,2720 4155,2834.53 4215,2834.53 5513.54,2914.96
  other v3: 3460,1415 5665,1415 3460,2885
IO4: C7.2 C8.2 J2.1 R7.2 U4.3 | length 879.9
  Top Layer w6: R7.2 3585,2598.8 C7.2 3586.2,2671.2 3619.71,2704.71 3714.71,2704.71 J2.1 3835,2705 3915,2625 4176.2,2625 C8.2 ; C8.2@4190,2613.04 4257.03,2613.04 U4.3
IO8: R12.2 U4.7 | length 71.1
  Top Layer w6: R12.2 4260.75,2372.56 U4.7
LATCH_CLK: J7.1 U4.16 U5.12 | length 530.4
  Top Layer w6: U4.16 5020.7,2609.06 5046.96,2582.8 U5.12 5162.8,2582.8 5210,2630 J7.1
NetC1_1: C1.1 R3.1 R5.2 U2.2 | length 298.9
  Top Layer w6: R3.1 3585.09,2238.9 C1.1 3597.37,2251.18 3715.07,2251.18 R5.2 3710,2266.1 U2.2
NetC1_2: C1.2 R3.2 R7.1 U2.1 | length 230.5
  Top Layer w6: R3.2 3585.09,2351.1 C1.2 ; R7.1 3585,2351.2 C1.2 ; U2.1 3660,2331.19 3651.19,2340 3596.2,2340 C1.2
NetC2_2: C2.2 C3.2 M1.1 R2.1 | length 281
  Top Layer w6: R2.1 3531.2,1796.2 C3.2 C2.2 3551.2,1975 M1.1
NetC6_1: C6.1 J4.1 M1.2 | length 167.7
  Top Layer w6: M1.2 3718.8,1975 C6.1 J4.1
NetC6_2: C6.2 R5.1 | length 67.7
  Top Layer w6: C6.2 R5.1
NetC9_2: C9.2 J3.1 R8.2 R10.2 U2.3 | length 382.1
  Top Layer w6: U2.3 3760,2288.7 3793.8,2254.9 C9.2 3793.8,2182.3 R8.2 3867.8,2171.1 3882.48,2156.42 3882.48,2106.96 3919.44,2070 J3.1
NetD1_1: D1.1 R6.2 | length 77.9
  Top Layer w6: R6.2 D1.1
NetD2_1: D2.1 R9.2 | length 77.9
  Top Layer w6: R9.2 D2.1
NetD3_1: D3.1 R13.2 | length 72.9
  Top Layer w6: D3.1 R13.2
NetD3_2: D3.2 U5.15 | length 723.7
  Top Layer w6: U5.15 5173.98,2506.02 5250,2430 5250,2210 5435,2025 D3.2
NetD4_1: D4.1 R14.2 | length 72.9
  Top Layer w6: D4.1 R14.2
NetD4_2: D4.2 U5.1 | length 453.7
  Top Layer w6: U5.1 5340.16,2449.84 5380,2410 5380,2200 5465,2115 D4.2
NetD5_1: D5.1 R15.2 | length 72.9
  Top Layer w6: D5.1 R15.2
NetD5_2: D5.2 U5.2 | length 430.6
  Top Layer w6: U5.2 5373.98,2506.02 5400,2480 5400,2240 5435,2205 D5.2
NetD6_1: D6.1 R16.2 | length 72.9
  Top Layer w6: D6.1 R16.2
NetD6_2: D6.2 U5.3 | length 351.2
  Top Layer w6: U5.3 5378.39,2531.61 5420,2490 5420,2340 5465,2295 D6.2
NetD7_1: D7.1 R17.2 | length 72.9
  Top Layer w6: D7.1 R17.2
NetD7_2: D7.2 U5.4 | length 289.4
  Top Layer w6: U5.4 5382.8,2557.2 5450,2490 5450,2400 5465,2385 D7.2
NetD8_1: D8.1 R18.2 | length 72.9
  Top Layer w6: D8.1 R18.2
NetD8_2: D8.2 U5.5 | length 210
  Top Layer w6: U5.5 5397.68,2582.8 D8.2
NetD9_1: D9.1 R20.2 | length 72.9
  Top Layer w6: D9.1 R20.2
NetD9_2: D9.2 U5.6 | length 183.3
  Top Layer w6: U5.6 5462.09,2608.39 D9.2
NetJ1_A5: J1.A5 R1.2 | length 114.4
  Top Layer w6: R1.2 5386.77,1685.79 J1.A5
NetJ1_B5: J1.B5 R4.2 | length 102.2
  Top Layer w6: R4.2 5444.05,1812.44 5452.59,1803.9 J1.B5
NetU2_6: U2.6 U2.7 | length 50
  Top Layer w6: U2.7 U2.6
NetU3_4: U3.4 U4.18 | length 587.5
  Top Layer w6: U4.18 v1(5052.83,2727.17) ; v1(5370,2730) 5446.69,2730 5501.73,2785.04 U3.4
  Bottom Layer w6: v1(5052.83,2727.17) 5054.25,2728.58 5368.58,2728.58 v1(5370,2730)
OE: R19.2 TP5.TP U4.15 U5.13 | length 559.1
  Top Layer w6: U4.15 5032.44,2550 R19.2 5040.35,2557.2 U5.13 5111.24,2558.6 5178.6,2558.6 v1(5180,2560) ; TP5.TP 5210,2335 v1(5210,2390)
  Bottom Layer w6: v1(5180,2560) 5230,2510 5230,2410 v1(5210,2390)
RXD: P1.3 U4.11 | length 445.6
  Top Layer w6: P1.3 4830,2240 4903.78,2313.78 U4.11
TXD: P1.2 U4.12 | length 507.6
  Top Layer w6: P1.2 4930,2100 5010,2180 5010,2350 4987.17,2372.83 U4.12
pads on no net: J1. J1.A8 J1.B8 U3.2 U4.5 U4.6 U4.8 U4.10 U5.7 U5.9

## Polygon pours and split planes (outlines as drawn)
GND on Bottom Layer "GND_L02_P000" (solid, pour order 0): 3300,3040 3920,3040 3920,2680 3940,2660 4040,2660 4060,2680 4060,3040 5820,3040 5820,1265 4140,1265 4140,2560 4120,2580 3940,2580 3920,2560 3920,2360 4060,2220 4060,1265 3300,1265

## Silkscreen, mask and mechanical layers (free items; w line width, h text height)
Top Overlay:
  lines w10: 3990,2695 3990,2995 ; 4025,2545 4025,2385 4105,2305 4105,1515
  text "CLK" at 5026.68,2976 h25
  text "LCLK" at 5164.18,2976 h25
  text "DIN" at 5328.76,2976 h25
  text "STATUS" at 5539.19,2976 h25
  text "GND Plane" at 3736.57,2857.5 h25
  text "Split" at 3849.03,2811.67 h25
  text "ADC IN" at 3646.27,2756 h25
  text "VOLUME" at 5539.19,2621 h25
  text "GND" at 5281.68,2269.01 h25
  text "OE" at 5139.17,2204.01 h25
  text "ESP32-C3" at 4509.71,2176 h25
  text "https://nicholasniles.com/" at 4630.12,2095 h30
  text "GND" at 3461.68,2059.01 h25
  text "DIGITAL" at 4289.2,2052.51 h35
  text "UART Header" at 4748.79,2011 h25
  text "CIRCUITRY" at 4254.21,1992.51 h35
  text "OPAMP+" at 3869.19,1989.01 h25
  text "3V3" at 3906.68,1949.01 h25
  text "3V3" at 4696.68,1849.01 h25
  text "RX" at 4809.17,1849.01 h25
  text "TX" at 4909.17,1849.01 h25
  text "GND" at 4996.68,1849.01 h25
  text "PWR Indicators" at 4305.47,1841 h25
  text "MIC" at 3688.76,1809.01 h25
  text "3V3" at 4586,1732.5 h25
  text "5V0" at 4201.68,1694.01 h25
  text "ANALOG CIRCUITRY" at 3446.75,1657.51 h35
  text "5V0" at 4586,1652.5 h25
  text "3V3" at 4741.68,1594.01 h25
  text "Designed by:" at 4613,1468.34 h35
  text "Volume Meter - Nicholas Niles" at 3666.12,1372.51 h65
Mechanical 1:
  the board outline again, w10